# Altium PCB AICat V1.7 双面板 板厚1.6mm_lrd.PcbDoc (part 1 of 6)
Units mm, origin at the board's own origin, x right, y up, seen from the top; angles counter-clockwise.
Board outline 63.83 x 43.59 mm, 2 copper layers (Top Layer, Bottom Layer); 123 components, 84 nets, 332 pads, 255 vias.
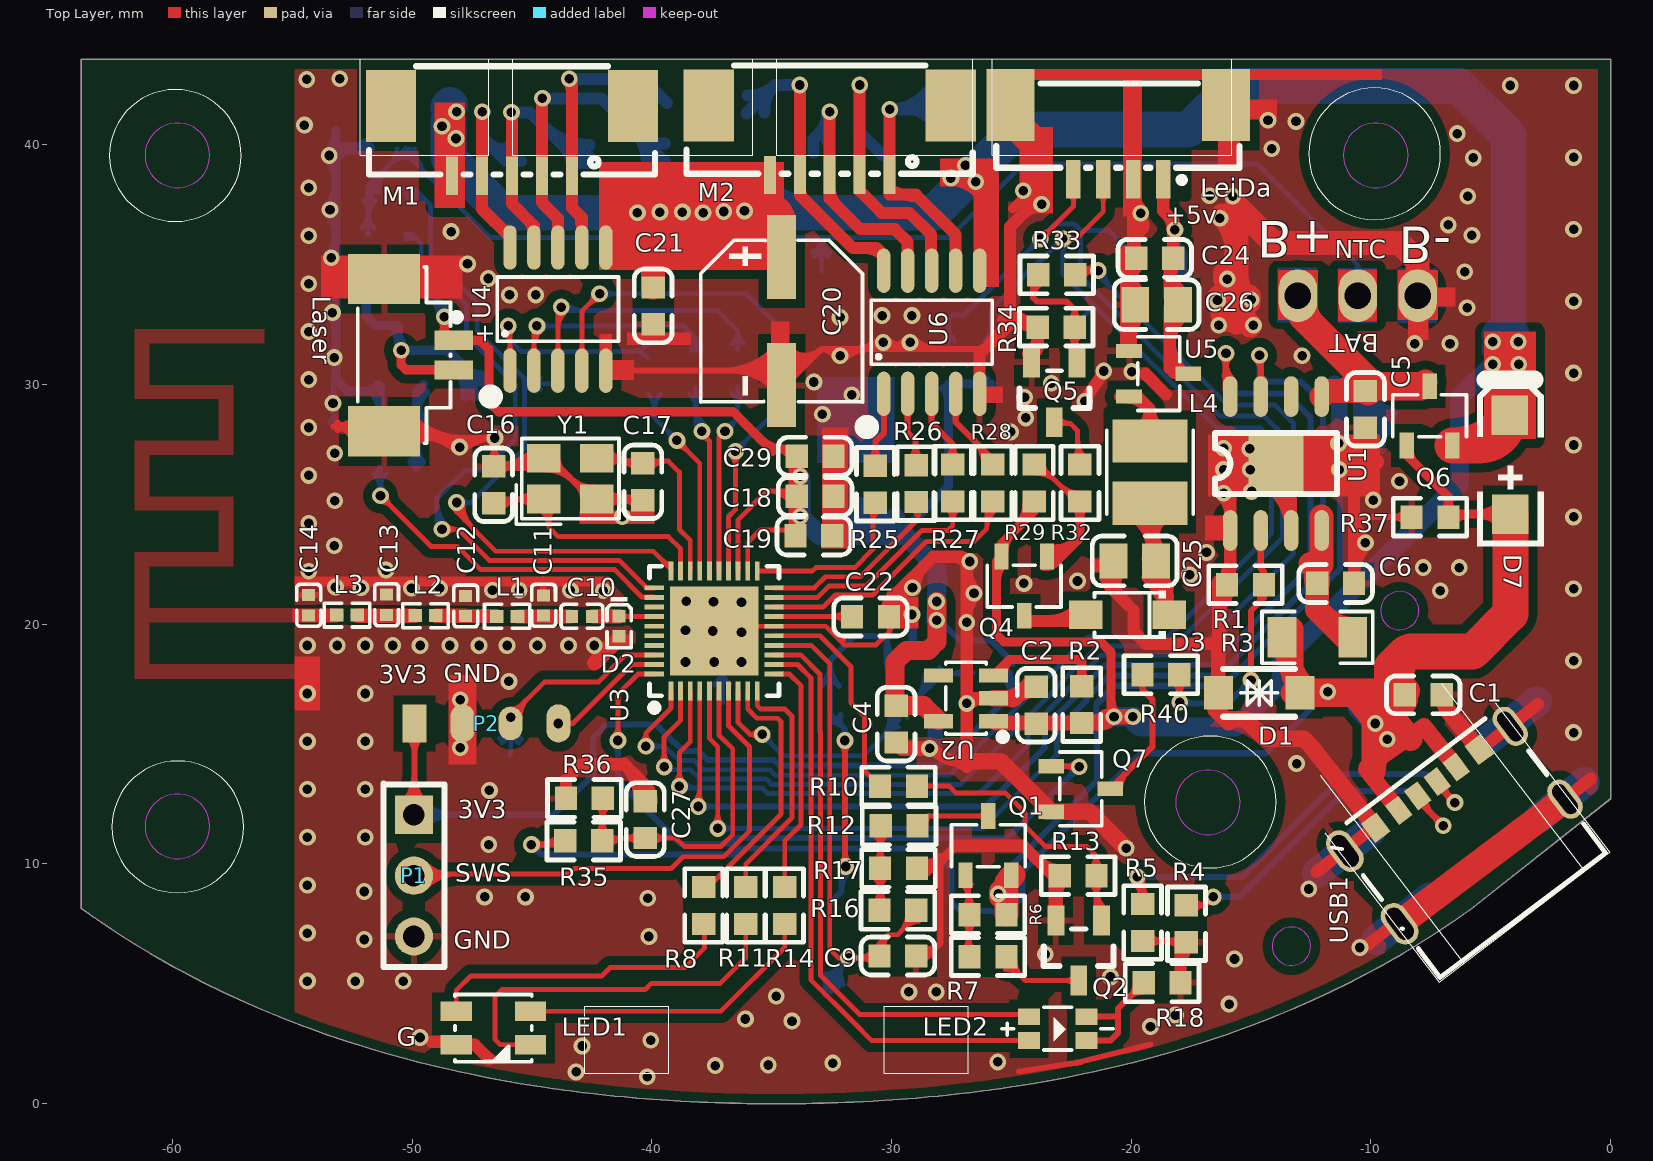
[diagram p0: Top Layer view]
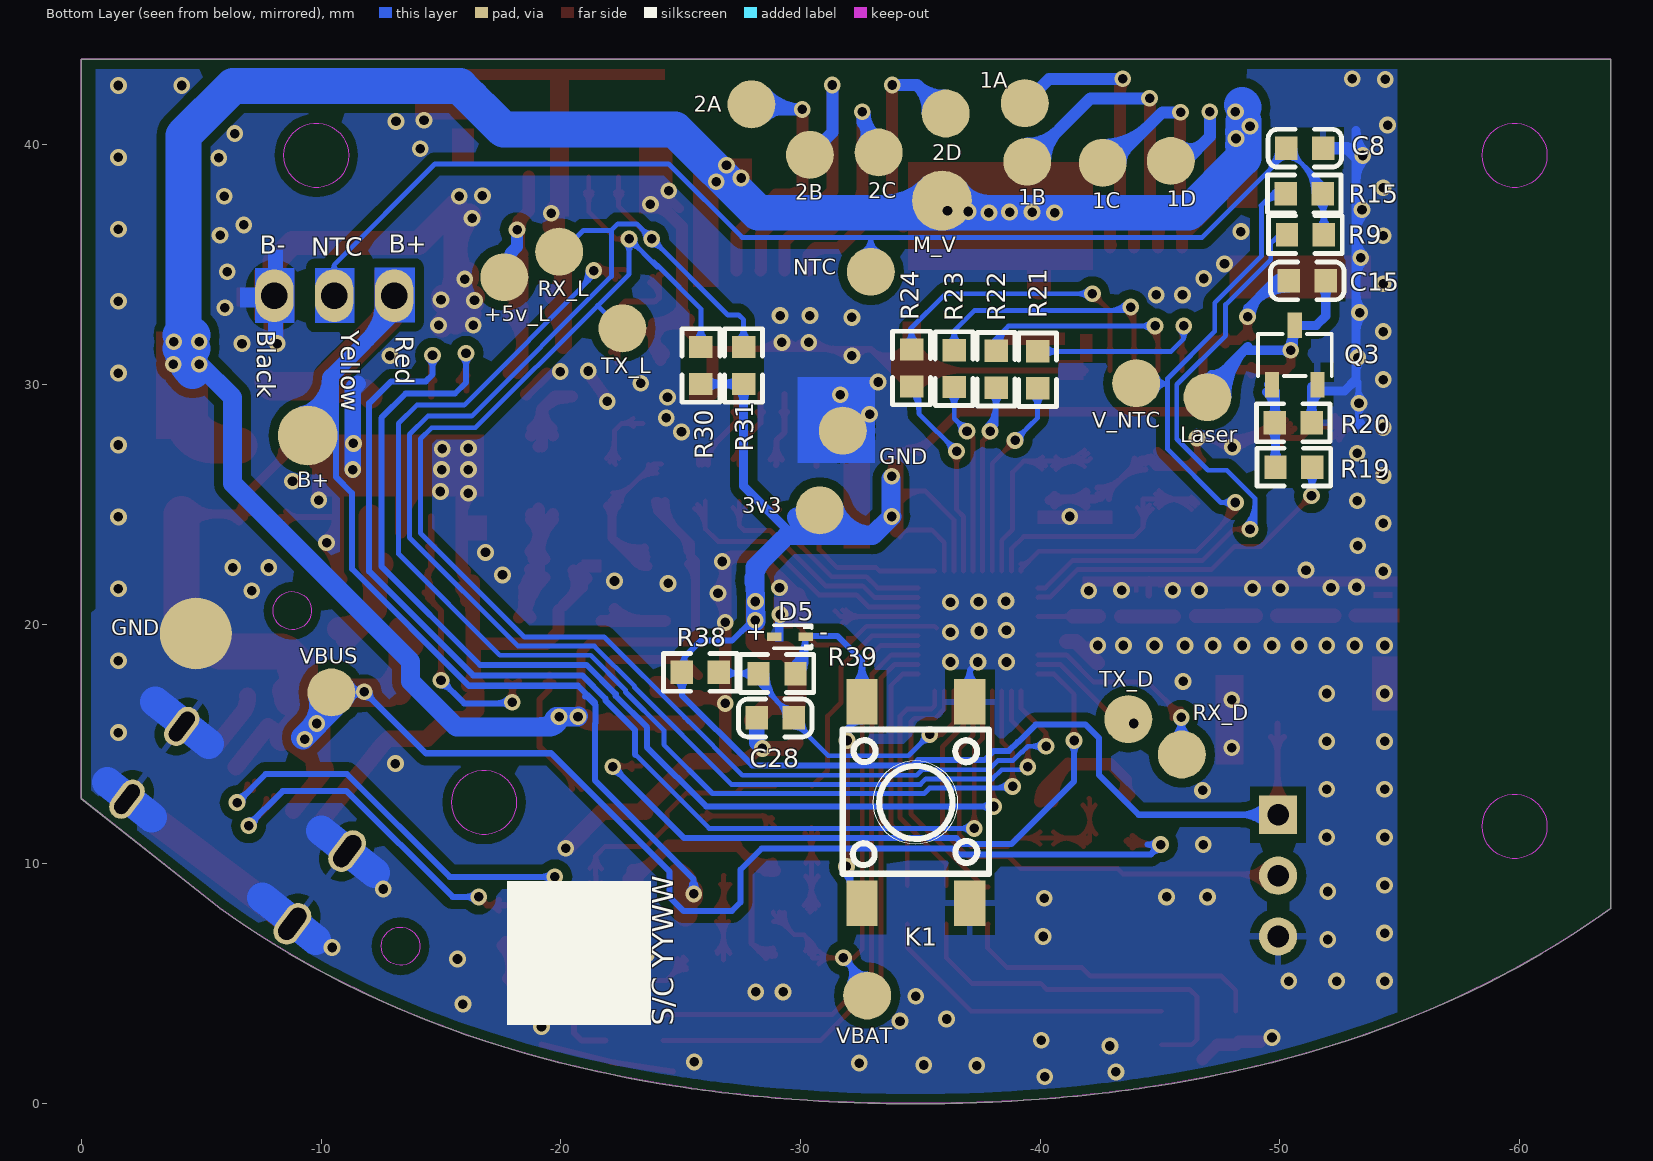
[diagram p1: Bottom Layer view, seen from below]
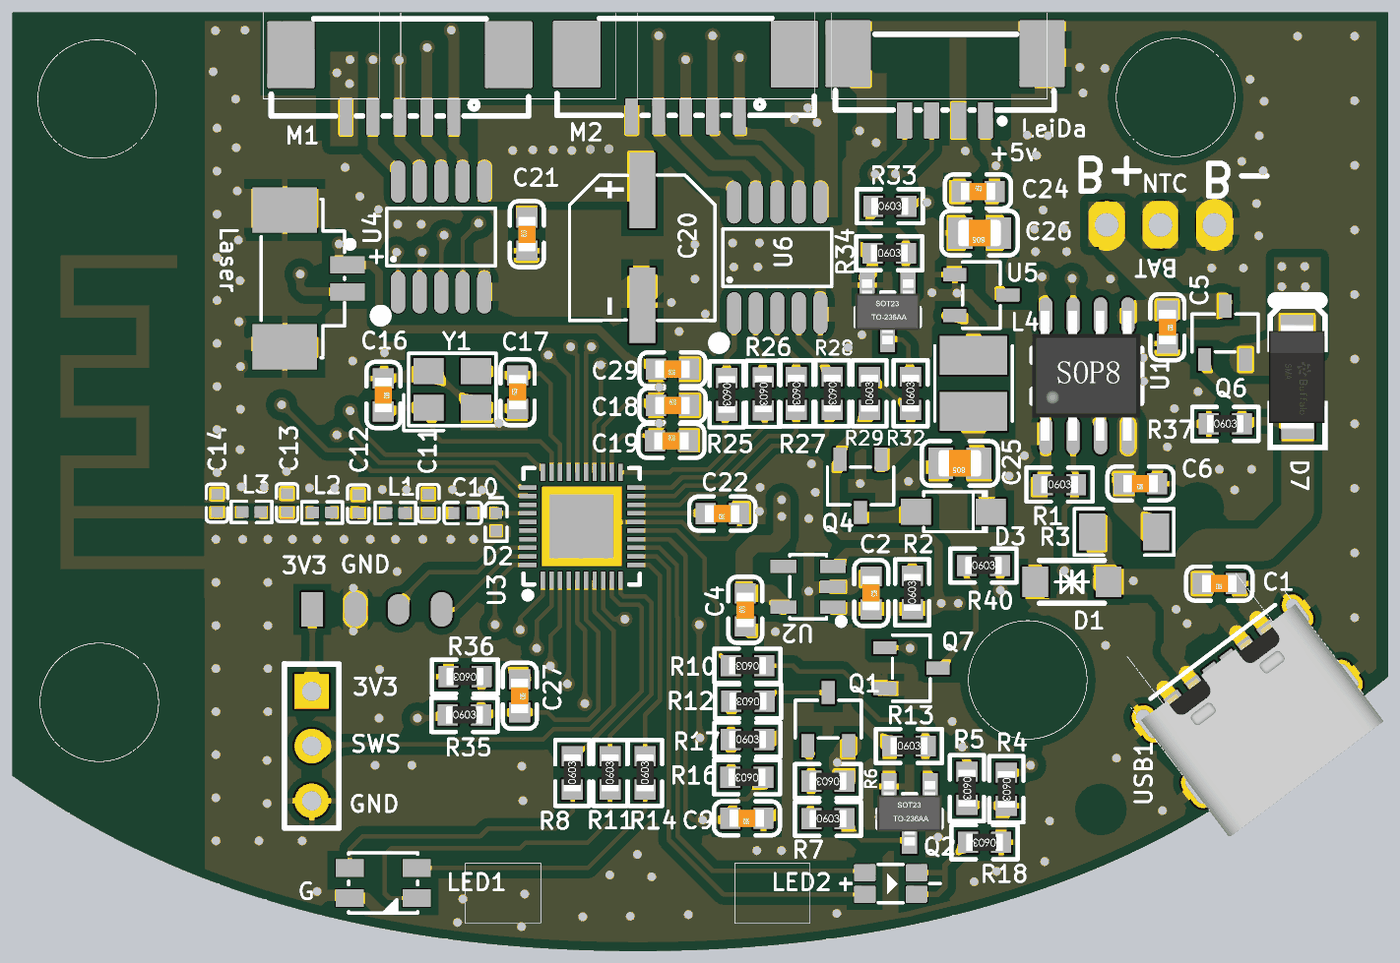
[diagram p7: 3D render of the assembled board from above, using the file's embedded part models]
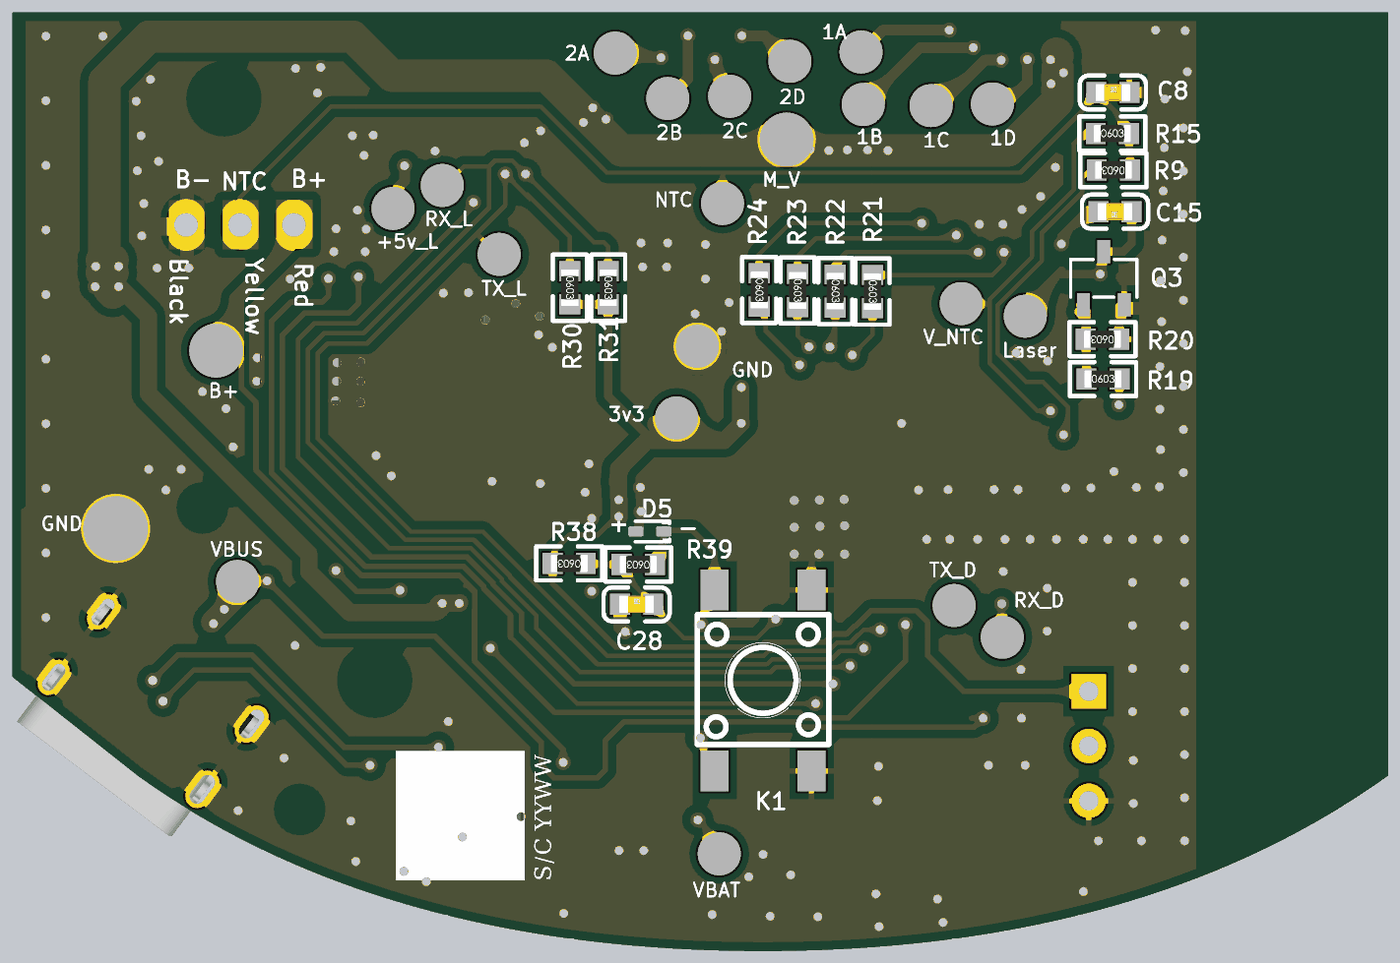
[diagram p8: 3D render of the assembled board from below, using the file's embedded part models]

## Layer stack, top to bottom
Top Solder: solder mask 0.0102, Solder Resist, Dk 3.5
Top Layer: signal copper 0.0356
Dielectric1: dielectric 0.32, FR-4, Dk 4.8
Bottom Layer: signal copper 0.0356
Bottom Solder: solder mask 0.0102, Solder Resist, Dk 3.5

## Board outline
-43.149,0.488 -42.885,0.456 -42.884,0.456 -42.587,0.421 -42.587,0.42 -42.257,0.383 -42.256,0.383 -41.927,0.347 -41.926,0.347 -41.564,0.31 -41.136,0.269 -40.644,0.226 -39.958,0.171 -39.309,0.127 -38.825,0.097 -38.407,0.075 -38.023,0.057 -38.022,0.057 -37.671,0.042 -37.353,0.03 -37.352,0.03 -37.067,0.021 -36.781,0.012 -36.528,0.006 -36.276,0.001 -36.024,-0.004 -36.023,-0.004 -35.803,-0.007 -35.583,-0.01 -35.363,-0.012 -35.175,-0.013 -34.987,-0.013 -34.8,-0.014 -34.612,-0.013 -34.424,-0.013 -34.236,-0.012 -34.016,-0.01 -33.796,-0.007 -33.576,-0.004 -33.324,0.001 -33.071,0.006 -32.818,0.012 -32.532,0.021 -32.247,0.03 -32.246,0.03 -31.928,0.042 -31.577,0.057 -31.192,0.075 -30.774,0.097 -30.29,0.127 -29.641,0.171 -28.955,0.226 -28.463,0.269 -28.035,0.31 -27.673,0.347 -27.672,0.347 -27.343,0.383 -27.342,0.383 -27.012,0.42 -27.012,0.421 -26.715,0.456 -26.714,0.456 -26.45,0.488 -26.186,0.522 -26.185,0.522 -25.921,0.557 -25.69,0.589 -25.458,0.621 -25.227,0.655 -24.996,0.689 -24.798,0.72 -24.107,0.831 -23.289,0.975 -23.288,0.975 -22.735,1.08 -22.281,1.17 -21.894,1.25 -21.54,1.326 -21.22,1.397 -20.933,1.463 -20.648,1.529 -20.395,1.59 -20.143,1.652 -19.924,1.707 -19.705,1.763 -19.178,1.902 -18.474,2.098 -18.473,2.098 -17.869,2.276 -17.332,2.441 -16.86,2.592 -16.423,2.737 -16.422,2.737 -16.019,2.875 -15.647,3.006 -15.308,3.129 -15.307,3.129 -14.999,3.244 -14.694,3.36 -14.363,3.488 -14.009,3.63 -13.605,3.795 -13.604,3.795 -13.152,3.987 -12.575,4.24 ccw(c-29.194,41.32) -10.846,5.065 -10.574,5.204 -10.573,5.204 -10.303,5.345 -9.986,5.513 -9.622,5.711 -9.215,5.939 -8.669,6.254 ccw(c-27.844,38.837) -6.797,7.43 ccw(c-27.664,38.569) -5.787,8.131 -5.787,8.132 0.008,12.717 0.013,12.741 0.013,43.562 0,43.575 -63.804,43.575 -63.817,43.562 -63.817,8.142 -63.812,8.131 ccw(c-41.932,38.573) -62.802,7.43 ccw(c-41.754,38.837) -60.93,6.254 -60.385,5.939 -59.977,5.711 -59.614,5.513 -59.296,5.345 -59.026,5.204 -59.025,5.204 -58.753,5.065 ccw(c-40.406,41.319) -57.024,4.24 -56.447,3.987 -55.995,3.795 -55.994,3.795 -55.59,3.63 -55.236,3.488 -54.906,3.36 -54.6,3.244 -54.292,3.129 -54.291,3.129 -53.952,3.006 -53.581,2.875 -53.177,2.737 -53.176,2.737 -52.739,2.592 -52.267,2.441 -51.73,2.276 -51.126,2.098 -51.125,2.098 -50.421,1.902 -49.894,1.763 -49.675,1.707 -49.456,1.652 -49.204,1.59 -48.951,1.53 -48.666,1.463 -48.379,1.397 -48.059,1.326 -47.706,1.25 -47.318,1.17 -46.864,1.08 -46.311,0.975 -46.31,0.975 -45.492,0.831 -44.801,0.72 -44.603,0.689 -44.372,0.655 -44.141,0.621 -43.91,0.589 -43.678,0.557 -43.414,0.522 -43.413,0.522

## Design rules (kind name [scope] priority, off if disabled: settings)
Clearance [All] p1: gap=0.14 ignorepadtopadclearanceinfootprint=FALSE
ComponentClearance [All] p1: gap=0 collisioncheckmode=3 verticalgap=0 showdistances=FALSE
FabricationTestPointUsage TestPointUsage [All] p1: valid=0 allowmultiple=FALSE
FabricationTestpoint Testpoint [All] p1: side=3 testpointundercomponent=TRUE minsize=1.016 maxsize=2.54 preferedsize=1.524 minholesize=0 maxholesize=1.016 preferedholesize=0.813 testpointgrid=0.025 allowsidetop=TRUE allowsidebottom=TRUE usegrid=TRUE gridtolerance=0
HoleToHoleClearance [All] p1: gap=0.102 allowstackedmicrovias=TRUE
MinimumSolderMaskSliver [All] p1: minsoldermaskwidth=0.051
PlaneConnect [All] p1: planeconnectstyle=Relief reliefexpansion=0.254 reliefentries=4 reliefconductorwidth=0.508 reliefairgap=0.254
PolygonConnect PolygonConnect_1 [IsVia] p1: connectstyle=Direct reliefconductorwidth=0.254 reliefentries=4 polygonreliefangle="90 Angle" airgapwidth=0.254
PolygonConnect [All] p2: connectstyle=Direct reliefconductorwidth=0.254 reliefentries=4 polygonreliefangle="90 Angle" airgapwidth=0.254
RoutingVias [All] p1: holewidth=0.711 width=1.27 viastyle="Through Hole" minholewidth=0.711 minwidth=1.27 maxholewidth=0.711 maxwidth=1.27
SilkToSilkClearance [All] p1: silktosilkclearance=0
SilkToSolderMaskClearance SilkscreenOverComponentPads [IsPad] p1: minsilkscreentomaskgap=0 clearancetoexposedcopper=TRUE
SolderMaskExpansion [All] p1: expansion=0.102 istentingtop=FALSE
Width [All] p1: maxlimit=2.54 minlimit=0.203 preferedwidth=0.254 minimp=50.000000 maximp=50.000000 favimp=50.000000
22 further rules are at their usual default settings.

## Classes and differential pairs
component class "ball V1.1": ANT1 BAT C1 C2 C4 C5 C6 C8 C9 C10 C11 C12 C13 C14 C15 C16 C17 C18 C19 C20 C21 C22 C24 C25 C26 C27 C28 C29 D1 D2 D3 D5 D7 K1 L1 L2 L3 L4 Laser LED1 LED2 LeiDa M1 M2 P1 P2 Q1 Q2 Q3 Q4 Q5 Q6 Q7 R1 R2 R3 R4 R5 R6 R7 R8 R9 R10 R11 R12 R13 R14 R15 R16 R17 R18 R19 R20 R21 R22 R23 R24 R25 R26 R27 R28 R29 R30 R31 R32 R33 R34 R35 R36 R37 R38 R39 R40 U1 U2 U3 U4 U5 U6 USB1 Y1

## Components (designator, comment, footprint, x,y, rotation, side; value= is the part's Value field where it differs from the comment)
1A "J-CSD" TP#1 -39.363,41.738 r270 bottom (schematic designator TP3)
1B "J-CSD" TP#1 -39.464,39.299 r270 bottom (schematic designator TP3)
1C "J-CSD" TP#1 -42.614,39.249 r270 bottom (schematic designator TP3)
1D "J-CSD" TP#1 -45.459,39.325 r270 bottom (schematic designator TP3)
2A "J-CSD" TP#1 -27.958,41.687 r270 bottom (schematic designator TP3)
2B "J-CSD" TP#1 -30.397,39.579 r270 bottom (schematic designator TP3)
2C "J-CSD" TP#1 -33.267,39.68 r270 bottom (schematic designator TP3)
2D "J-CSD" TP#1 -36.061,41.306 r270 bottom (schematic designator TP3)
3v3 "J-CSD" TP#1 -30.803,24.745 r270 bottom (schematic designator TP3)
+5v_L "J-CSD" TP#1 -17.646,34.473 r270 bottom (schematic designator TP3)
B+ "J-CSD" TP#2 -9.442,27.869 r270 bottom (schematic designator TP3)
BAT "BX-PH2.0-3PWT" HDR-TH_3P-P2.50_ZX-XH2.54-3PWZ -9.848,37.852 r180 top (schematic designator BAT1)
C1 "0.1uF" 0603_C -7.816,17.049 r180 top
C2 "1uf" 0603_C -23.97,16.617 r270 top
C4 "10uF" 0603_C -29.812,15.83 r90 top
C5 "10uf" 0603_C -10.229,28.962 r270 top
C6 "10UF" 0603_c -11.474,21.697 r180 top
C8 "100nF" 0603_C -51.047,39.858 r180 bottom
C9 "100nF" 0603_C -29.736,6.152 r180 top
C10 "220pF" C0402 -42.919,20.326 r180 top
C11 "NC" C0402 -44.519,20.783 r270 top
C12 "NC" C0402 -47.77,20.757 r270 top
C13 "NC" C0402 -51.072,20.808 r270 top
C14 "NC" C0402 -54.323,20.788 r270 top
C15 "0.1uf/25v" 0603_C -51.148,34.321 r0 bottom
C16 "12PF" 0603_c -46.602,25.812 r270 top
C17 "12PF" 0603_c -40.379,25.939 r90 top
C18 "1UF" 0603_c -33.191,25.329 r0 top
C19 "1UF" 0603_c -33.241,23.678 r0 top
C20 "220uF/10V" "SMD 6.3*5.4 电解" -34.613,32.492 r270 top
C21 "100nf" 0603_C -39.947,33.28 r90 top
C22 "1UF" 0603_c -30.879,20.3 r180 top
C24 "0.1uF" 0603_C -19.017,35.261 r0 top
C25 "22uf-16v" 0805_c -19.856,22.637 r180 top
C26 "22uf-16v" 0805_c -18.941,33.33 r180 top
C27 "0.1uF" 0603_C -40.277,11.842 r270 top
C28 "100nF" 0603_c -28.949,16.084 r180 bottom
C29 "10uF 10v" 0603_C -33.191,27.006 r180 top
D1 "SMF5.0CA_C726939" "SOD-123 双向" -14.496,17.074 r0 top
D2 "SE6V3LHN102T 6.3v单向" 0402-D -41.242,19.843 r270 top
D3 "DSK24" SOD-123FL -20.313,20.224 r180 top
D5 "esd5z5.0t1g-ms" SOD-523_L1.2-W0.8-LS1.6-RD -29.566,19.472 r0 bottom
D7 "SS54" SMA -4.108,26.041 r270 top
GND "J-CSD" TP#3 -4.776,19.609 r270 bottom (schematic designator TP3)
GND "J-CSD" TP#1 -31.768,28.073 r270 bottom (schematic designator TP3)
K1 "KEY" KEY_SMD_4P -34.816,12.604 r270 bottom locked
L1 "0R" R0402 -46.043,20.326 r180 top
L2 "0R" R0402 -49.447,20.351 r180 top
L3 "0R" R0402 -52.723,20.376 r180 top
L4 "47uH" IND-SMD_L3.5-W3.0_CD31 -19.221,26.345 r90 top
Laser "JiGuang" CONN-SMD_2P-P1.25-LT -49.726,31.222 r270 top (schematic designator CN1)
Laser "J-CSD" TP#1 -46.983,29.47 r270 bottom (schematic designator TP3)
LED1 "XL-A3528RGBC-BM" LED-ARRAY-SMD_4P-L3.2-W2.8-LS3.5-BL_XL-A3528RGBC-BM -46.615,3.147 r0 top
LED2 "*" LED-SMD_4P-L3.2-W1.6-TL_XL-3216SURUGC -23.068,3.122 r0 top
LeiDa "HC-1.25-4PLT" CONN-SMD_4P-P1.25_LT -20.541,40.112 r180 top (schematic designator CN2)
M1 "MOTORA" CONN-SMD_1.25-5PLT -45.84,40.163 r180 top (schematic designator J1)
M2 "MOTORB" CONN-SMD_1.25-5PLT -32.581,40.188 r180 top (schematic designator J2)
M_V "J-CSD" TP#2 -35.908,37.674 r270 bottom (schematic designator TP3)
NTC "J-CSD" TP#1 -32.937,34.702 r270 bottom (schematic designator TP3)
P1 "DEBUG" SIP4-2.54#1 -49.929,14.585 r270 top (schematic designator P2)
P2 "UART" SIP4-2.54#2 -49.904,15.855 r0 top
Q1 "SI2301 P" SOT-23 -25.748,10.242 r270 top
Q2 "S8050" SOT-23(SOT-23-3) -22.192,6.381 r90 top
Q3 "AO3400" SOT-23 -50.844,30.714 r270 bottom
Q4 "SI2301 P" SOT-23 -24.682,22.104 r90 top
Q5 "S8050" SOT-23(SOT-23-3) -23.208,29.673 r90 top
Q6 "3401" SOT-23 -7.333,28.174 r270 top
Q7 "2N7002" SOT-23 -22.624,12.909 r180 top
R1 "3.9K" 0603_R -15.233,21.646 r0 top
R2 "10k" 0603_R -22.065,16.643 r90 top
R3 "R250" 1206_R -12.388,19.411 r180 top
R4 "5.1K" 0603_R -17.697,7.499 r270 top
R5 "5.1K" 0603_R -19.525,7.549 r270 top
R6 "560K" 0603_R -25.977,7.88 r180 top
R7 "1K" 0603_R -25.977,6.127 r0 top
R8 "1k" 0603_R -37.839,8.261 r90 top
R9 "10k" 0603_R -51.072,36.251 r0 bottom
R10 "1K" 0603_r -29.711,13.239 r180 top
R11 "1k" 0603_R -36.086,8.261 r90 top
R12 "560K" 0603_R -29.685,11.588 r180 top
R13 "10K" 0603_r -22.218,9.505 r0 top
R14 "1k" 0603_R -34.461,8.261 r90 top
R15 "100R" 0603_R -51.021,37.953 r180 bottom
R16 "1K" 0603_R -29.736,8.057 r180 top
R17 "100K" 0603_R -29.711,9.81 r0 top
R18 "1K" 0603_R -18.713,5.035 r180 top
R19 "330R" 0603_R -50.59,26.549 r180 bottom
R20 "10K" 0603_R -50.564,28.403 r0 bottom
R21 "330R" 0603_R -39.896,30.613 r270 bottom
R22 "330R" 0603_R -38.169,30.638 r270 bottom
R23 "330R" 0603_R -36.416,30.663 r270 bottom
R24 "330R" 0603_R -34.638,30.689 r270 bottom
R25 "330R" 0603_R -30.676,25.837 r270 top
R26 "330R" 0603_R -28.974,25.863 r270 top
R27 "330R" 0603_R -27.45,25.888 r270 top
R28 "330R" 0603_R -25.774,25.888 r270 top
R29 "560K" 0603_R -24.047,25.888 r90 top
R30 "1M" 0603_R -25.85,30.79 r270 bottom
R31 "1M" 0603_R -27.628,30.79 r270 bottom
R32 "1K" 0603_R -22.142,25.888 r90 top
R33 "1K" 0603_r -23.107,34.575 r0 top
R34 "10K" 0603_r -23.132,32.391 r0 top
R35 "10K" 0603_R -42.843,10.953 r0 top
R36 "20K" 0603_R -42.817,12.731 r180 top
R37 "10K" 0603_R -7.537,24.466 r0 top
R38 "10k" 0603_R -25.825,17.989 r0 bottom
R39 "100R" 0603_r -29.025,17.938 r0 bottom
R40 "2k" 0603_R -18.763,17.887 r0 top
RX_D "J-CSD" TP#1 -45.916,14.56 r270 bottom (schematic designator TP3)
RX_L "J-CSD" TP#1 -19.932,35.54 r270 bottom (schematic designator TP3)
TX_D "J-CSD" TP#1 -43.681,16.033 r270 bottom (schematic designator TP3)
TX_L "J-CSD" TP#1 -22.573,32.34 r270 bottom (schematic designator TP3)
U1 "TP4056X" SOP8-9 -13.963,26.701 r0 top
U2 "SSP7615" SOT-23-5 -27.069,16.465 r180 top
U3 "TLSR8208C" QFN-40_L5.0-W5.0-P0.40-BL-EP3.7 -37.356,19.64 r0 top
U4 "ULN2802" ESSOP-10 -43.782,32.949 r0 top
U5 "HE9116A50NR" SOT-23 -19.373,30.232 r180 top
U6 "ULN2802" ESSOP-10 -28.187,31.984 r0 top
USB1 "TYPE-C 6P" TPYE-C-6 -6.495,11.613 r127 top
V_NTC "J-CSD" TP#1 -44.011,30.054 r270 bottom (schematic designator TP3)
VBAT "J-CSD" TP#1 -32.784,4.501 r270 bottom (schematic designator TP3)
VBUS "J-CSD" TP#1 -10.432,17.151 r270 bottom (schematic designator TP3)
Y1 "24MHz +-20PPM" CRYSTAL-SMD_4P-L3.2-W2.5 -43.122,26.015 r0 top

## Footprints (in the part's own frame and the unit in brackets; to place one, negate y for a bottom-side part, rotate by r counter-clockwise, add the part's x,y. Pads: shape width x height; smd on the part's side, far side on the other; paste and mask are expansions set on the pad)
0402-D [mm]
  rect 0.505x0.551 smd paste-100 mask+0.051: 1(-0.484,-0.131) 2(0.349,-0.131)
  silkscreen extent -1.27,-0.64 0.83,0.37
0603_C [mm]
  rect 0.93x0.98 smd: 1(-0.77,0) 2(0.77,0)
  silkscreen extent -1.54,-0.79 1.54,0.79, body extent -0.8,-0.4 0.8,0.4, height 0.3
0603_c [mm]
  rect 0.93x0.98 smd: 1(-0.77,0) 2(0.77,0)
  silkscreen extent -1.54,-0.79 1.54,0.79, body extent -0.8,-0.4 0.8,0.4, height 0.3
0603_R [mm]
  rect 0.93x0.98 smd: 1(-0.77,0) 2(0.77,0)
  silkscreen extent -1.53,-0.79 1.54,0.79, body extent -0.85,-0.4 0.85,0.4, height 0.56
0603_r [mm]
  rect 0.93x0.98 smd: 1(-0.77,0) 2(0.77,0)
  silkscreen extent -1.53,-0.79 1.54,0.79, body extent -0.85,-0.4 0.85,0.4, height 0.56
0805_c [mm]
  rect 1.16x1.47 smd: 1(-0.89,0) 2(0.89,0)
  silkscreen extent -1.77,-1.04 1.77,1.04, body extent -1,-0.62 1,0.63, height 0.77
1206_R [mm]
  rect 1.208x1.701 smd: 1(-1.631,-0.039) 2(1.326,-0.039)
  silkscreen extent -2.46,-1.12 2.16,1.04
C0402 [mm]
  rect 0.5x0.54 smd: 1(-0.42,0) 2(0.42,0)
  silkscreen extent -0.87,-0.5 0.87,0.5
CONN-SMD_1.25-5PLT [mm]
  rect 0.5x1.6 smd paste+0.051: 1(-2.5,1.45) 2(-1.25,1.45) 3(0,1.45) 4(1.25,1.45) 5(2.5,1.45)
  rect 2.1x3 smd paste+0.051: 6(-5.05,-1.45) 7(5.05,-1.45)
  silkscreen extent -5.97,-3.12 5.97,1.4
CONN-SMD_2P-P1.25-LT [mm]
  rect 0.8x1.6 smd paste+0 mask+0.05: 1(-0.625,1.45) 2(0.625,1.45)
  rect 2.1x3 smd paste+0 mask+0.05: 3(-3.175,-1.45) 4(3.175,-1.45)
  silkscreen extent -3.68,-2.55 3.68,1.73
CONN-SMD_4P-P1.25_LT [mm]
  rect 0.6x1.6 smd paste+0.051: 1(-1.875,1.55) 2(-0.625,1.55) 3(0.625,1.55) 4(1.875,1.55)
  rect 2x3 smd paste+0.051: 5(-4.5,-1.55) 6(4.5,-1.55)
  silkscreen extent -5.06,-2.45 5.09,1.7
CRYSTAL-SMD_4P-L3.2-W2.5 [mm]
  rect 1.4x1.2 smd: 1(-1.383,-0.797) 2(0.817,-0.797) 3(0.817,0.903) 4(-1.383,0.903)
  silkscreen extent -2.54,-1.85 1.75,1.73
ESSOP-10 [mm]
  oval 0.56x1.855 smd paste+0.051: 1(-2.141,-2.375) 2(-1.141,-2.375) 3(-0.141,-2.375) 4(0.859,-2.375) 5(1.859,-2.375) 6(1.859,2.765) 7(0.859,2.765) 8(-0.141,2.765) 9(-1.141,2.765) 10(-2.141,2.765)
  silkscreen extent -2.67,-1.14 2.39,1.53
HDR-TH_3P-P2.50_ZX-XH2.54-3PWZ [mm]
  oval 1.6x2.2 hole 1.1: 1(-1.801,4.145) 2(0.699,4.145) 3(3.199,4.145)
IND-SMD_L3.5-W3.0_CD31 [mm]
  rect 1.8x3.12 smd: 1(-1.303,0) 2(1.303,0)
  silkscreen extent -1.75,-1.8 1.75,1.8
KEY_SMD_4P [mm]
  rect 1.9x1.3 smd: 1(-4.155,2.252) 2(4.244,2.252) 3(-4.155,-2.247) 4(4.244,-2.247)
  silkscreen extent -3.01,-3.05 3.02,3.05
LED-ARRAY-SMD_4P-L3.2-W2.8-LS3.5-BL_XL-A3528RGBC-BM [mm]
  rect 1.3x0.82 smd paste+0 mask+0.05: 1(-1.55,-0.7) 2(-1.55,0.7) 3(1.55,-0.7) 4(1.55,0.7)
  silkscreen extent -1.6,-1.4 1.6,1.4
LED-SMD_4P-L3.2-W1.6-TL_XL-3216SURUGC [mm]
  rect 0.9x0.7 smd paste+0.051: 1(-1.2,0.5) 2(1.2,0.5) 3(-1.2,-0.5) 4(1.2,-0.5)
  silkscreen extent -2.33,-0.89 2.3,0.89
QFN-40_L5.0-W5.0-P0.40-BL-EP3.7 [mm]
  rect 0.2x0.8 smd paste-100 mask+0.05: 1(-1.847,-2.425) 2(-1.447,-2.425) 3(-1.047,-2.425) 4(-0.647,-2.425) 5(-0.247,-2.425) 6(0.153,-2.425) 7(0.553,-2.425) 8(0.953,-2.425) 9(1.353,-2.425) 10(1.753,-2.425) 21(1.753,2.573) 22(1.353,2.573) 23(0.953,2.573) 24(0.553,2.573) 25(0.153,2.573) 26(-0.247,2.573) 27(-0.647,2.573) 28(-1.047,2.573) 29(-1.447,2.573) 30(-1.847,2.573)
  rect 0.8x0.2 smd paste-100 mask+0.05: 11(2.452,-1.726) 12(2.452,-1.326) 13(2.452,-0.926) 14(2.452,-0.526) 15(2.452,-0.126) 16(2.452,0.274) 17(2.452,0.674) 18(2.452,1.074) 19(2.452,1.474) 20(2.452,1.874) 31(-2.546,1.874) 32(-2.546,1.474) 33(-2.546,1.074) 34(-2.546,0.674) 35(-2.546,0.274) 36(-2.546,-0.126) 37(-2.546,-0.526) 38(-2.546,-0.926) 39(-2.546,-1.326) 40(-2.546,-1.726)
  rect 3.7x3.7 smd paste-100 mask+0.05: 41(-0.047,0.074)
  silkscreen extent -2.75,-3.28 2.65,2.77
R0402 [mm]
  rect 0.566x0.54 smd paste-100 mask+0.051: 1(-0.433,0) 2(0.433,0)
  silkscreen extent -0.94,-0.5 0.94,0.5
SIP4-2.54#1 [mm]
  rect 1.6x1.6 hole 0.9: 2(2.54,0)
  round 1.6 hole 0.9: 3(5.08,0) 4(7.62,0)
  silkscreen extent 1.24,-1.27 8.89,1.27
SIP4-2.54#2 [mm]
  rect 1x1.6 smd: 1(0,0)
  oval 1x1.6 smd: 2(2,0) 4(6,0)
  oval 1x1.4 smd: 3(4,0)
SMA [mm]
  rect 1.65x1.53 smd: 1(1.449,-0.076) 2(-2.665,-0.102)
  silkscreen extent -4.16,-1.47 2.8,1.32, body extent -3.06,-1.39 1.84,1.18, height 2.39
"SMD 6.3*5.4 电解" [mm]
  rect 3.5x1.2 smd: 1(-2.822,0.023) 2(2.518,0.023)
  silkscreen extent -3.53,-3.35 3.22,3.4
"SOD-123 双向" [mm]
  rect 1.2x1.4 smd: 1(-1.864,0.06) 2(1.536,0.06)
  silkscreen extent -1.66,-0.94 1.34,1.06
SOD-123FL [mm]
  rect 1.4x1.2 smd: 1(1.579,-0.166) 2(-1.891,-0.166)
  silkscreen extent -1.76,-1.17 1.22,0.84
SOD-523_L1.2-W0.8-LS1.6-RD [mm]
  rect 0.6x0.36 smd paste+0.051 mask+0: 1(-0.65,0) 2(0.65,0)
  silkscreen extent -0.91,-0.55 0.68,0.55
SOP8-9 [mil]
  oval 24x66.93 smd: 1(-75,-110) 2(-25,-110) 3(25,-110) 4(75,-110) 5(75,110) 6(25,110) 7(-25,110) 8(-75,110)
  rect 90.55x90.55 smd: 9(0,0)
  silkscreen extent -100,-50 100,50, body extent -100,-119 98,119, height 63
SOT-23 [mm]
  rect 1.07x0.6 smd: 1(0.719,-1.166) 2(0.719,0.734) 3(-1.751,-0.216)
  silkscreen extent -1.39,-1.75 0.36,1.32
SOT-23(SOT-23-3) [mm]
  rect 1.25x0.7 smd: 1(1.25,-0.95) 2(1.25,0.95) 3(-1.25,0)
  silkscreen extent -0.65,-1.46 0.9,1.46, body extent -1.5,-1.5 1.5,1.5, height 1.3
SOT-23-5 [mm]
  rect 1.2x0.6 smd paste+0 mask+0.05: 1(-1.325,0.51) 2(-1.325,-0.44) 3(-1.325,-1.39) 4(0.975,-1.39) 5(0.975,0.51)
  silkscreen extent -1.85,-1.94 0.67,1.32
TP#1 [mm]
  round 2 smd: 1(0,0)
TP#2 [mm]
  round 2.5 smd: 1(0,0)
TP#3 [mm]
  round 3 smd: 1(0,0)
TPYE-C-6 [mm]
  oval 1.9x1.1 hole 0.7 slot 1.5 at 0 deg: 7(-1.9,4.32) 7(1.9,4.32)
  oval 1.8x1 hole 0.6 slot 1.4 at 0 deg: 7(-1.9,-4.32) 7(1.9,-4.32)
  rect 1x0.7 smd: A5(1.9,0.5) A9(1.9,-1.5) B5(1.9,-0.5) B9(1.9,1.5)
  rect 1x0.8 smd: A12(1.9,-2.7) B12(1.9,2.7)
  silkscreen extent -4.7,-4.32 2.79,4.65, body extent -4.55,-4.45 2.25,4.49, height 3.41

## Part data
C1 C4 C5 C15 C24 C27 C29: library part Cap, "Capacitor"
C2 C21 C25 C26: library part Cap1, "无极电容"
C6 C8 C9 C18 C19 C22: library part CAP
C10 C11 C12 C13 C14 C16 C17: library part CAP, "Capacitor"
C20: library part RVT1A221M0605_C72494
C28: library part CAP_0603
D2: library part TPNSR05F20NXT5G
D3 D7: library part "Diode 1N4148", "High Conductance Fast Diode"
D5: library part LESD5Z5.0CT1G
K1: library part TS-1002S-05026C
L1 L2 L3: library part INDUCTOR
L4: library part "CD31-470M 47UH"
Laser: library part HC-1.25-2PLT
LED2: library part TJ-S2012SW8TCGLC2R2G-A5
M1 M2: library part HC-1.25-5PLT
P1 P2: library part "Header 4", "Header, 4-Pin"
Q1 Q3 Q4: library part JMTL3400A
Q2 Q5: library part NPN_sot23, "NPN三极管"
Q6: library part CJ3401
Q7: library part AO3400_SOT23
R1 R3 R4 R5 R6 R7 R8 R11 R12 R14 R16 R17 R18 R20 R29 R30 R31 R32 R35 R36 R38 R40: library part RES
R2 R9 R10 R13 R15 R19 R21 R22 R23 R24 R25 R26 R27 R28 R33 R34 R37: library part Res2, "Resistor"
R39: library part Res_0603
U1: library part TP4056, "TP4056"
U2: library part SSP7615-33M5R
U4 U6: library part ULN2802_C2828555
USB1: library part "TYPE-C 6P LTH6.5"
Y1: library part TAXM13.56M4RLBCCT2T

## Via types
v1: diameter 0.7, hole 0.4, Top Layer to Bottom Layer, tented both sides, 255 vias

## Nets (pads, with @x,y where several pads share a name; then routed paths per layer and width w, separated by ;. In a path a pad name is that pad's centre, name@x,y a point inside that pad or via, vN(x,y) a via of type N, cw(c..) or ccw(c..) an arc to the next point about the centre after c; other vN are vias at no path point)
3V3: 3v3.1 C4.2 C15.2 C18.1 C19.1 C29.2 Laser.1@-48.276,31.847 P1.2 P2.1 R30.2 R31.2 R38.2 U2.5 U3.22 U3.23 | length 239.9
  Top Layer w0.203: U3.23@-36.403,22.213 -36.403,24.352 -35.197,25.558 ; U3.22@-36.003,22.213 -36.003,23.221 -36.003,23.406 -35.477,23.932 -34.596,23.932 ; -34.607,23.932 cw(c-34.607,23.442) C19.1@-34.158,23.639 ; C18.1@-34.037,25.558 -34.435,25.558 ; -35.197,25.558 cw(c-35.197,24.29) -34.236,25.117 ccw(c-35.197,24.29) -35.197,25.558 ; -35.197,25.558 -34.435,25.558 ; -34.638,25.558 cw(c-34.638,25.233) C18.1@-34.318,25.29 ; -34.638,25.558 cw(c-34.638,25.233) C18.1@-34.318,25.29 ; -34.638,25.558 cw(c-34.638,25.233) C18.1@-34.318,25.29 ; -34.638,25.558 -34.435,25.558 ; C18.1@-34.396,25.558 cw(c-34.396,25.276) C18.1@-34.118,25.326 ; C18.1@-34.396,25.558 cw(c-34.396,25.276) C18.1@-34.118,25.326 ; C18.1@-34.396,25.558 cw(c-34.396,25.276) C18.1@-34.118,25.326 ; -34.754,25.558 cw(c-34.754,24.671) -34.082,25.25 ccw(c-34.754,24.671) -34.754,25.558
  Top Layer w0.254: P1.2@-49.929,12.045 -49.904,12.071 P2.1@-49.904,15.855 ; P1.2@-50.405,12.521 ccw(c-51.615,13.731) -49.904,13.731 ; P1.2@-50.405,12.521 ccw(c-51.615,13.731) -49.904,13.731 ; P1.2@-50.405,12.521 ccw(c-51.615,13.731) -49.904,13.731 ; P1.2@-50.405,12.521 ccw(c-51.615,13.731) -49.904,13.731 ; P1.2@-50.405,12.521 ccw(c-51.615,13.731) -49.904,13.731 ; P1.2@-50.225,12.341 ccw(c-51.002,13.118) -49.904,13.118 ; P1.2@-50.225,12.341 ccw(c-51.002,13.118) -49.904,13.118 ; P1.2@-50.225,12.341 ccw(c-51.002,13.118) -49.904,13.118 ; P1.2@-50.225,12.341 ccw(c-51.002,13.118) -49.904,13.118 ; P1.2@-50.225,12.341 ccw(c-51.002,13.118) -49.904,13.118 ; P2.1@-50.168,15.291 cw(c-50.804,14.655) -49.904,14.655 ; P2.1@-50.168,15.291 cw(c-50.804,14.655) -49.904,14.655 ; P2.1@-50.168,15.291 cw(c-50.804,14.655) -49.904,14.655 ; P2.1@-50.168,15.291 cw(c-50.804,14.655) -49.904,14.655 ; P2.1@-50.168,15.291 cw(c-50.804,14.655) -49.904,14.655 ; -49.904,12.995 ccw(c-48.979,12.995) P1.2@-49.633,12.341 ; -49.904,12.995 ccw(c-48.979,12.995) P1.2@-49.633,12.341 ; -49.904,12.995 ccw(c-48.979,12.995) P1.2@-49.633,12.341 ; -49.904,12.995 ccw(c-48.979,12.995) P1.2@-49.633,12.341 ; -49.904,12.995 ccw(c-48.979,12.995) P1.2@-49.633,12.341 ; -49.904,13.609 ccw(c-48.366,13.609) P1.2@-49.453,12.521 ; -49.904,13.609 ccw(c-48.366,13.609) P1.2@-49.453,12.521 ; -49.904,13.609 ccw(c-48.366,13.609) P1.2@-49.453,12.521 ; -49.904,13.609 ccw(c-48.366,13.609) P1.2@-49.453,12.521 ; -49.904,13.609 ccw(c-48.366,13.609) P1.2@-49.453,12.521 ; -49.904,14.655 cw(c-49.003,14.655) P2.1@-49.64,15.291 ; -49.904,14.655 cw(c-49.003,14.655) P2.1@-49.64,15.291 ; -49.904,14.655 cw(c-49.003,14.655) P2.1@-49.64,15.291 ; -49.904,14.655 cw(c-49.003,14.655) P2.1@-49.64,15.291 ; -49.904,14.655 cw(c-49.003,14.655) P2.1@-49.64,15.291
  Top Layer w0.381: v1(-48.659,32.822) -48.659,32.23 Laser.1@-48.276,31.847 -47.176,31.847 -46.805,31.476 -46.805,29.266 -46.399,28.86 -36.614,28.86 -35.956,28.203 ; -35.553,27.799 -35.956,28.203 ; -35.44,27.687 ccw(c-34.519,28.608) -34.519,27.305 ; -34.963,27.209 -35.956,28.203 ; C29.2@-34.404,27.209 C29.2@-34.011,27.209 ; C19.1@-34.037,23.932 C19.1@-34.011,23.958 ; Laser.1@-48.824,31.995 ccw(c-49.222,32.394) -48.659,32.394 ; Laser.1@-48.824,31.995 ccw(c-49.222,32.394) -48.659,32.394 ; Laser.1@-48.824,31.995 ccw(c-49.222,32.394) -48.659,32.394 ; Laser.1@-48.824,31.995 ccw(c-49.222,32.394) -48.659,32.394 ; Laser.1@-48.824,31.995 ccw(c-49.222,32.394) -48.659,32.394 ; v1@-48.772,32.71 cw(c-49.044,32.437) -48.659,32.437 ; v1@-48.772,32.71 cw(c-49.044,32.437) -48.659,32.437 ; v1@-48.772,32.71 cw(c-49.044,32.437) -48.659,32.437 ; v1@-48.772,32.71 cw(c-49.044,32.437) -48.659,32.437 ; v1@-48.772,32.71 cw(c-49.044,32.437) -48.659,32.437 ; -48.659,32.312 ccw(c-48.211,32.312) Laser.1@-48.528,31.995 ; -48.659,32.312 ccw(c-48.211,32.312) Laser.1@-48.528,31.995 ; -48.659,32.312 ccw(c-48.211,32.312) Laser.1@-48.528,31.995 ; -48.659,32.312 ccw(c-48.211,32.312) Laser.1@-48.528,31.995 ; -48.659,32.312 ccw(c-48.211,32.312) Laser.1@-48.528,31.995 ; -48.659,32.437 cw(c-48.274,32.437) v1@-48.546,32.71 ; -48.659,32.437 cw(c-48.274,32.437) v1@-48.546,32.71 ; -48.659,32.437 cw(c-48.274,32.437) v1@-48.546,32.71 ; -48.659,32.437 cw(c-48.274,32.437) v1@-48.546,32.71 ; -48.659,32.437 cw(c-48.274,32.437) v1@-48.546,32.71 ; Laser.1@-47.728,31.699 cw(c-47.37,31.341) -47.37,31.847 ; Laser.1@-47.728,31.699 cw(c-47.37,31.341) -47.37,31.847 ; Laser.1@-47.728,31.699 cw(c-47.37,31.341) -47.37,31.847 ; Laser.1@-47.728,31.699 cw(c-47.37,31.341) -47.37,31.847 ; Laser.1@-47.728,31.699 cw(c-47.37,31.341) -47.37,31.847 ; Laser.1@-47.728,31.995 ccw(c-47.37,32.353) -47.37,31.847 ; Laser.1@-47.728,31.995 ccw(c-47.37,32.353) -47.37,31.847 ; Laser.1@-47.728,31.995 ccw(c-47.37,32.353) -47.37,31.847 ; Laser.1@-47.728,31.995 ccw(c-47.37,32.353) -47.37,31.847 ; Laser.1@-47.728,31.995 ccw(c-47.37,32.353) -47.37,31.847
  Top Layer w0.6: C19.1@-34.011,23.958 C29.2@-34.011,27.006 ; -34.011,24.784 cw(c-33.44,24.784) C18.1@-33.844,25.188 ; -34.011,24.784 cw(c-33.44,24.784) C18.1@-33.844,25.188 ; -34.011,24.784 cw(c-33.44,24.784) C18.1@-33.844,25.188 ; -34.011,25.875 ccw(c-33.44,25.875) C18.1@-33.844,25.471 ; -34.011,25.875 ccw(c-33.44,25.875) C18.1@-33.844,25.471 ; -34.011,25.875 ccw(c-33.44,25.875) C18.1@-33.844,25.471 ; -34.011,26.46 cw(c-33.44,26.46) C29.2@-33.844,26.864 ; -34.011,26.46 cw(c-33.44,26.46) C29.2@-33.844,26.864 ; -34.011,26.46 cw(c-33.44,26.46) C29.2@-33.844,26.864 ; C19.1@-34.011,23.92 cw(c-33.292,23.92) -33.775,24.454 ccw(c-33.292,23.92) C19.1@-34.011,23.92 ; C18.1@-34.011,25.102 ccw(c-33.197,25.102) -33.773,24.527 cw(c-33.197,25.102) C18.1@-34.011,25.102 ; C18.1@-34.011,25.556 cw(c-33.197,25.556) -33.773,26.132 ccw(c-33.197,25.556) C18.1@-34.011,25.556 ; C29.2@-34.011,26.779 ccw(c-33.197,26.779) -33.773,26.203 cw(c-33.197,26.779) C29.2@-34.011,26.779
  Top Layer w0.8: C4.2@-29.863,16.82 -29.863,18.421 -29.381,18.903 ; C4.2@-29.812,16.6 -28.652,16.6 U2.5@-28.044,15.992 ; -29,18.903 -29.381,18.903 ; v1@-28.119,20.935 v1(-28.119,20.165) -28.111,20.157 -28.111,19.259 -28.466,18.903 -29.381,18.903
  Bottom Layer w0.254: P1.2@-49.929,12.045 -44.113,12.045 -42.462,13.696 -42.462,15.246 -41.903,15.804 -39.82,15.804 -39.094,15.078 -39.061,15.078 -38.695,14.712 -38.067,14.712 -37.686,14.331 -34.908,14.331 -34.68,14.103 -27.984,14.103 -25.055,17.032 R38.2@-25.055,17.989 ; v1@-28.268,20.777 cw(c-28.649,20.397) -28.111,20.397 cw(c-27.572,20.397) v1@-27.953,20.777 ; v1@-28.111,20.275 -27.145,19.31 -26.561,19.31 ; -26.256,19.31 -26.561,19.31 ; -25.799,19.259 -25.65,19.109 ; R38.2@-25.294,17.725 cw(c-25.871,17.148) -25.055,17.148 cw(c-24.239,17.148) R38.2@-24.816,17.725 ; P1.2@-49.633,11.749 cw(c-48.918,11.034) -48.918,12.045 ; P1.2@-49.633,11.749 cw(c-48.918,11.034) -48.918,12.045 ; P1.2@-49.633,11.749 cw(c-48.918,11.034) -48.918,12.045 ; P1.2@-49.633,11.749 cw(c-48.918,11.034) -48.918,12.045 ; P1.2@-49.633,11.749 cw(c-48.918,11.034) -48.918,12.045 ; P1.2@-49.633,12.341 ccw(c-48.918,13.057) -48.918,12.045 ; P1.2@-49.633,12.341 ccw(c-48.918,13.057) -48.918,12.045 ; P1.2@-49.633,12.341 ccw(c-48.918,13.057) -48.918,12.045 ; P1.2@-49.633,12.341 ccw(c-48.918,13.057) -48.918,12.045 ; P1.2@-49.633,12.341 ccw(c-48.918,13.057) -48.918,12.045 ; P1.2@-49.453,11.569 cw(c-48.304,10.42) -48.304,12.045 ; P1.2@-49.453,11.569 cw(c-48.304,10.42) -48.304,12.045 ; P1.2@-49.453,11.569 cw(c-48.304,10.42) -48.304,12.045 ; P1.2@-49.453,11.569 cw(c-48.304,10.42) -48.304,12.045 ; P1.2@-49.453,11.569 cw(c-48.304,10.42) -48.304,12.045 ; P1.2@-49.453,12.521 ccw(c-48.304,13.67) -48.304,12.045 ; P1.2@-49.453,12.521 ccw(c-48.304,13.67) -48.304,12.045 ; P1.2@-49.453,12.521 ccw(c-48.304,13.67) -48.304,12.045 ; P1.2@-49.453,12.521 ccw(c-48.304,13.67) -48.304,12.045 ; P1.2@-49.453,12.521 ccw(c-48.304,13.67) -48.304,12.045 ; -26.561,19.31 -25.85,19.31 -25.65,19.109 ; -25.65,19.109 -25.156,18.616 ; -25.156,18.616 ccw(c-24.862,18.616) -24.952,18.336 cw(c-24.862,18.616) -25.156,18.616 ; v1@-28.119,19.942 cw(c-28.119,19.12) -27.537,19.701 ccw(c-28.119,19.12) v1@-28.119,19.942 ; R38.2@-25.294,18.253 ccw(c-25.625,18.584) -25.156,18.584 cw(c-25.625,18.584) R38.2@-25.294,18.253
  Bottom Layer w0.381: C15.2@-50.378,34.321 -49.802,34.321 ; v1(-48.659,32.822) -48.659,33.178 ; -29.228,23.501 -29.423,23.695 -29.558,23.831 -27.628,25.761 R31.2@-27.628,30.02 R30.2@-25.85,30.02 ; C15.2@-50.441,34.382 cw(c-50.156,33.993) -49.815,34.334 ; C15.2@-50.441,34.382 cw(c-50.156,33.993) -49.815,34.334 ; C15.2@-50.441,34.382 cw(c-50.156,33.993) -49.815,34.334 ; C15.2@-50.441,34.382 cw(c-50.156,33.993) -49.815,34.334 ; C15.2@-50.441,34.382 cw(c-50.156,33.993) -49.815,34.334 ; C15.2@-50.378,34.021 cw(c-50.378,31.907) -48.883,33.402 ; C15.2@-50.378,34.021 cw(c-50.378,31.907) -48.883,33.402 ; C15.2@-50.378,34.021 cw(c-50.378,31.907) -48.883,33.402 ; C15.2@-50.378,34.021 cw(c-50.378,31.907) -48.883,33.402 ; C15.2@-50.378,34.021 cw(c-50.378,31.907) -48.883,33.402 ; C15.2@-50.378,34.402 cw(c-50.378,33.208) -49.534,34.053 ; C15.2@-50.378,34.402 cw(c-50.378,33.208) -49.534,34.053 ; C15.2@-50.378,34.402 cw(c-50.378,33.208) -49.534,34.053 ; C15.2@-50.378,34.402 cw(c-50.378,33.208) -49.534,34.053 ; C15.2@-50.378,34.402 cw(c-50.378,33.208) -49.534,34.053 ; C15.2@-50.216,34.075 cw(c-49.89,33.632) -49.502,34.02 ; C15.2@-50.216,34.075 cw(c-49.89,33.632) -49.502,34.02 ; C15.2@-50.216,34.075 cw(c-49.89,33.632) -49.502,34.02 ; C15.2@-50.216,34.075 cw(c-49.89,33.632) -49.502,34.02 ; C15.2@-50.216,34.075 cw(c-49.89,33.632) -49.502,34.02 ; C15.2@-50.165,34.148 cw(c-49.802,33.853) -49.802,34.321 ; C15.2@-50.165,34.148 cw(c-49.802,33.853) -49.802,34.321 ; C15.2@-50.165,34.148 cw(c-49.802,33.853) -49.802,34.321 ; C15.2@-50.165,34.148 cw(c-49.802,33.853) -49.802,34.321 ; C15.2@-50.165,34.148 cw(c-49.802,33.853) -49.802,34.321 ; C15.2@-50.165,34.494 ccw(c-49.802,34.788) -49.802,34.321 ; C15.2@-50.165,34.494 ccw(c-49.802,34.788) -49.802,34.321 ; C15.2@-50.165,34.494 ccw(c-49.802,34.788) -49.802,34.321 ; C15.2@-50.165,34.494 ccw(c-49.802,34.788) -49.802,34.321 ; C15.2@-50.165,34.494 ccw(c-49.802,34.788) -49.802,34.321 ; -49.802,34.321 -48.659,33.178 ; -49.183,33.702 cw(c-50.062,32.822) v1@-48.819,32.822 ; -49.183,33.702 cw(c-50.062,32.822) v1@-48.819,32.822 ; -49.183,33.702 cw(c-50.062,32.822) v1@-48.819,32.822 ; -49.183,33.702 cw(c-50.062,32.822) v1@-48.819,32.822 ; -49.183,33.702 cw(c-50.062,32.822) v1@-48.819,32.822 ; v1@-48.765,32.941 ccw(c-48.976,33.178) -48.659,33.178 ; v1@-48.765,32.941 ccw(c-48.976,33.178) -48.659,33.178 ; v1@-48.765,32.941 ccw(c-48.976,33.178) -48.659,33.178 ; v1@-48.765,32.941 ccw(c-48.976,33.178) -48.659,33.178 ; -48.659,33.178 ccw(c-48.343,33.178) v1@-48.553,32.941 ; -48.659,33.178 ccw(c-48.343,33.178) v1@-48.553,32.941 ; -48.659,33.178 ccw(c-48.343,33.178) v1@-48.553,32.941 ; -48.659,33.178 ccw(c-48.343,33.178) v1@-48.553,32.941 ; R31.2@-27.822,29.826 cw(c-28.291,29.358) -27.628,29.358 ; R31.2@-27.822,29.826 cw(c-28.291,29.358) -27.628,29.358 ; R31.2@-27.822,29.826 cw(c-28.291,29.358) -27.628,29.358 ; R31.2@-27.822,29.826 cw(c-28.291,29.358) -27.628,29.358 ; R31.2@-27.822,29.826 cw(c-28.291,29.358) -27.628,29.358 ; -27.628,29.358 cw(c-26.965,29.358) R31.2@-27.434,29.826 ; -27.628,29.358 cw(c-26.965,29.358) R31.2@-27.434,29.826 ; -27.628,29.358 cw(c-26.965,29.358) R31.2@-27.434,29.826 ; -27.628,29.358 cw(c-26.965,29.358) R31.2@-27.434,29.826 ; -27.628,29.358 cw(c-26.965,29.358) R31.2@-27.434,29.826 ; R31.2@-27.409,29.826 cw(c-26.94,29.358) -26.94,30.02 ; R31.2@-27.409,29.826 cw(c-26.94,29.358) -26.94,30.02 ; R31.2@-27.409,29.826 cw(c-26.94,29.358) -26.94,30.02 ; R31.2@-27.409,29.826 cw(c-26.94,29.358) -26.94,30.02 ; R31.2@-27.409,29.826 cw(c-26.94,29.358) -26.94,30.02 ; R31.2@-27.409,30.214 ccw(c-26.94,30.683) -26.94,30.02 ; R31.2@-27.409,30.214 ccw(c-26.94,30.683) -26.94,30.02 ; R31.2@-27.409,30.214 ccw(c-26.94,30.683) -26.94,30.02 ; R31.2@-27.409,30.214 ccw(c-26.94,30.683) -26.94,30.02 ; R31.2@-27.409,30.214 ccw(c-26.94,30.683) -26.94,30.02 ; -26.538,30.02 cw(c-26.538,29.358) R30.2@-26.069,29.826 ; -26.538,30.02 ccw(c-26.538,30.683) R30.2@-26.069,30.214 ; -26.538,30.02 cw(c-26.538,29.358) R30.2@-26.069,29.826 ; -26.538,30.02 ccw(c-26.538,30.683) R30.2@-26.069,30.214 ; -26.538,30.02 ccw(c-26.538,30.683) R30.2@-26.069,30.214 ; -26.538,30.02 cw(c-26.538,29.358) R30.2@-26.069,29.826 ; -26.538,30.02 ccw(c-26.538,30.683) R30.2@-26.069,30.214 ; -26.538,30.02 cw(c-26.538,29.358) R30.2@-26.069,29.826 ; -26.538,30.02 ccw(c-26.538,30.683) R30.2@-26.069,30.214 ; -26.538,30.02 cw(c-26.538,29.358) R30.2@-26.069,29.826
  Bottom Layer w0.8: v1(-33.808,24.491) -33.012,23.695 -29.423,23.695 ; v1@-33.783,24.593 v1@-33.783,26.066 ; -29.228,23.501 -28.111,22.383 -28.111,21.748 v1(-28.123,20.945) -28.135,20.165 v1@-28.136,20.122 ; -28.474,22.747 cw(c-29.473,21.748) -28.061,21.748 ; -28.474,22.747 cw(c-29.473,21.748) -28.061,21.748 ; -28.474,22.747 cw(c-29.473,21.748) -28.061,21.748 ; -33.012,23.695 ccw(c-33.012,25.399) -31.378,24.915 cw(c-33.012,25.399) -33.012,23.695 ; -31.941,23.695 ccw(c-31.941,25.082) -30.611,24.688 cw(c-31.941,25.082) -31.941,23.695 ; -30.87,23.695 ccw(c-30.87,24.765) -29.844,24.461 cw(c-30.87,24.765) -30.87,23.695
  other v1: -33.808,26.168
+5V: +5v_L.1 C24.2 C26.1 LeiDa.1 U5.3 | length 43.5
  Top Layer w0.508: LeiDa.1@-18.666,38.664 LeiDa.1@-18.666,38.562 -18.666,37.246 -18.247,36.828 ; -18.408,30.674 C26.1@-18.408,33.254 ; C24.2@-18.103,35.261 C24.2@-18.247,35.261 ; C26.1@-18.003,33.231 -18.407,33.635 -18.407,35.261 C24.2@-18.247,35.261 ; -18.408,30.969 ccw(c-17.717,30.969) -18.205,30.481 ; -18.408,30.969 ccw(c-17.717,30.969) -18.205,30.481 ; -18.408,30.969 ccw(c-17.717,30.969) -18.205,30.481 ; -18.408,31.527 cw(c-16.403,31.527) C26.1@-17.821,32.945 ; -18.408,31.527 cw(c-16.403,31.527) C26.1@-17.821,32.945 ; -18.408,31.527 cw(c-16.403,31.527) C26.1@-17.821,32.945 ; -18.408,31.527 cw(c-16.403,31.527) C26.1@-17.821,32.945 ; -18.408,31.527 cw(c-16.403,31.527) C26.1@-17.821,32.945 ; -18.407,34.342 cw(c-17.353,34.342) C24.2@-18.098,35.087 ; -18.407,34.342 cw(c-17.353,34.342) C24.2@-18.098,35.087 ; -18.407,34.342 cw(c-17.353,34.342) C24.2@-18.098,35.087 ; -18.407,34.342 cw(c-17.353,34.342) C24.2@-18.098,35.087 ; -18.407,34.342 cw(c-17.353,34.342) C24.2@-18.098,35.087 ; C24.2@-18.407,35.131 ccw(c-16.406,35.131) C26.1@-17.821,33.716 ; C24.2@-18.407,35.131 ccw(c-16.406,35.131) C26.1@-17.821,33.716 ; C24.2@-18.407,35.131 ccw(c-16.406,35.131) C26.1@-17.821,33.716 ; C24.2@-18.407,35.131 ccw(c-16.406,35.131) C26.1@-17.821,33.716 ; C24.2@-18.407,35.131 ccw(c-16.406,35.131) C26.1@-17.821,33.716 ; C24.2@-18.397,35.435 ccw(c-18.757,35.795) -18.247,35.795 ; C24.2@-18.397,35.435 ccw(c-18.757,35.795) -18.247,35.795 ; C24.2@-18.397,35.435 ccw(c-18.757,35.795) -18.247,35.795 ; C24.2@-18.397,35.435 ccw(c-18.757,35.795) -18.247,35.795 ; C24.2@-18.397,35.435 ccw(c-18.757,35.795) -18.247,35.795 ; C24.2@-18.247,35.261 -18.247,36.828 ; -18.247,35.795 ccw(c-17.738,35.795) C24.2@-18.098,35.435 ; -18.247,35.795 ccw(c-17.738,35.795) C24.2@-18.098,35.435 ; -18.247,35.795 ccw(c-17.738,35.795) C24.2@-18.098,35.435 ; -18.247,35.795 ccw(c-17.738,35.795) C24.2@-18.098,35.435 ; -18.247,35.795 ccw(c-17.738,35.795) C24.2@-18.098,35.435 ; -18.247,36.828 ccw(c-17.838,36.828) -18.114,36.525 cw(c-17.838,36.828) -18.247,36.828 ; -18.559,37.139 cw(c-19.243,36.455) -18.275,36.455 ccw(c-19.243,36.455) -18.559,37.139 ; -18.408,31.889 ccw(c-16.416,31.889) -17.824,30.481 cw(c-16.416,31.889) -18.408,31.889 ; -18.4,36.98 cw(c-18.758,36.622) -18.271,36.481 ccw(c-18.758,36.622) -18.4,36.98 ; -18.247,36.058 cw(c-17.783,36.058) -18.111,36.387 ccw(c-17.783,36.058) -18.247,36.058
  Bottom Layer w0.508: v1(-18.179,36.455) -18.179,35.743 -17.9,35.464 -17.9,34.727 +5v_L.1@-17.646,34.473
AD_BAT: C9.2 R16.1 U3.14 VBAT.1 | length 53.9
  Top Layer w0.203: U3.14@-34.904,19.114 -33.35,19.114 -32.581,18.344 -32.581,6.432 -32.225,6.076 v1(-31.794,6.076) ; v1@-31.768,6.076 -30.506,6.076 C9.2@-30.506,6.152 -30.506,6.678 ; -29.516,7.262 ccw(c-30.21,7.956) R16.1@-29.228,7.956 ; -29.411,7.366 cw(c-28.865,6.82) R16.1@-28.865,7.593 ; R16.1@-28.865,7.981 -28.865,7.913 -29.736,7.041 -30.143,7.041 ; -31.384,6.076 cw(c-31.384,5.199) -30.763,5.819 ccw(c-31.384,5.199) -31.384,6.076 ; -31.384,6.076 ccw(c-31.384,6.953) -30.763,6.333 cw(c-31.384,6.953) -31.384,6.076 ; C9.2@-30.663,6.429 ccw(c-30.782,6.678) -30.506,6.678 ; C9.2@-30.663,6.429 ccw(c-30.782,6.678) -30.506,6.678 ; C9.2@-30.663,6.429 ccw(c-30.782,6.678) -30.506,6.678 ; -30.506,6.678 ccw(c-30.23,6.678) C9.2@-30.349,6.429 ; -30.506,6.678 ccw(c-30.23,6.678) C9.2@-30.349,6.429 ; -30.506,6.678 ccw(c-30.23,6.678) C9.2@-30.349,6.429 ; -30.506,6.678 ccw(c-30.307,6.678) -30.378,6.492 cw(c-30.307,6.678) -30.506,6.678 ; -30.506,6.678 cw(c-30.705,6.678) -30.635,6.492 ccw(c-30.705,6.678) -30.506,6.678 ; -30.506,6.678 -30.143,7.041 ; -30.143,7.041 ccw(c-29.762,6.661) -30.206,6.357 cw(c-29.762,6.661) -30.143,7.041 ; v1@-31.446,6.076 ccw(c-31.446,7.042) -30.763,6.359 cw(c-31.446,7.042) v1@-31.446,6.076 ; -31.321,6.076 cw(c-31.321,5.287) -30.763,5.845 ccw(c-31.321,5.287) -31.321,6.076 ; C9.2@-30.542,6.128 cw(c-30.173,6.38) -30.489,6.695 ccw(c-30.173,6.38) C9.2@-30.542,6.128 ; C9.2@-30.374,6.242 cw(c-29.968,6.52) -30.316,6.868 ccw(c-29.968,6.52) C9.2@-30.374,6.242 ; -29.664,7.114 ccw(c-30.471,7.921) -29.33,7.948 cw(c-30.471,7.921) -29.664,7.114 ; -29.638,7.139 ccw(c-30.394,7.895) -29.329,7.979 cw(c-30.394,7.895) -29.638,7.139 ; -29.339,7.438 cw(c-28.966,7.065) -28.966,7.593 ccw(c-28.966,7.065) -29.339,7.438 ; -29.328,7.45 ccw(c-29.815,7.937) -29.126,7.952 cw(c-29.815,7.937) -29.328,7.45 ; -29.327,7.451 ccw(c-29.816,7.94) -29.126,7.994 cw(c-29.816,7.94) -29.327,7.451 ; -29.253,7.525 cw(c-28.966,7.239) -28.966,7.644 ccw(c-28.966,7.239) -29.253,7.525
  Bottom Layer w0.203: VBAT.1@-32.784,4.501 -32.784,5.111 v1@-31.87,6.025 ; v1@-31.87,6.025 ccw(c-31.245,5.4) -32.008,4.954 cw(c-31.245,5.4) v1@-31.87,6.025 ; VBAT.1@-32.784,5.4 ccw(c-32.784,6.097) -32.291,5.604 cw(c-32.784,6.097) VBAT.1@-32.784,5.4 ; VBAT.1@-32.535,4.647 cw(c-31.951,4.988) -32.429,5.466 ccw(c-31.951,4.988) VBAT.1@-32.535,4.647 ; VBAT.1@-32.359,4.749 cw(c-31.715,5.125) -32.243,5.653 ccw(c-31.715,5.125) VBAT.1@-32.359,4.749 ; -32.261,5.634 cw(c-31.794,5.167) -31.794,5.828 ccw(c-31.794,5.167) -32.261,5.634 ; -32.2,5.695 ccw(c-32.58,6.076) -32.042,6.076 cw(c-32.58,6.076) -32.2,5.695 ; VBAT.1@-32.184,4.852 cw(c-31.48,5.263) -32.056,5.839 ccw(c-31.48,5.263) VBAT.1@-32.184,4.852
AD_NTC: R15.1 U3.30 V_NTC.1 | length 62.3
  Top Layer w0.203: v1(-48.151,25.075) -48.151,24.681 ; U3.30@-39.203,22.213 -39.203,22.3 -39.947,23.043 -46.514,23.043 -48.151,24.681 ; v1@-48.309,25.075 ccw(c-47.737,25.075) -48.142,24.671 ; v1@-48.309,25.075 ccw(c-47.737,25.075) -48.142,24.671 ; v1@-48.309,25.075 ccw(c-47.737,25.075) -48.142,24.671 ; v1@-48.309,25.075 ccw(c-47.737,25.075) -48.142,24.671 ; v1@-48.309,25.075 ccw(c-47.737,25.075) -48.142,24.671 ; v1@-48.259,24.851 cw(c-48.341,24.681) -48.151,24.681 ; v1@-48.259,24.851 cw(c-48.341,24.681) -48.151,24.681 ; v1@-48.259,24.851 cw(c-48.341,24.681) -48.151,24.681 ; v1@-48.259,24.851 cw(c-48.341,24.681) -48.151,24.681 ; v1@-48.259,24.851 cw(c-48.341,24.681) -48.151,24.681 ; v1@-48.259,24.851 cw(c-48.341,24.681) -48.151,24.681 ; v1@-48.259,24.851 cw(c-48.341,24.681) -48.151,24.681 ; v1@-48.259,24.851 cw(c-48.341,24.681) -48.151,24.681 ; -48.151,24.681 cw(c-47.962,24.681) v1@-48.044,24.851 ; -48.151,24.681 cw(c-47.962,24.681) v1@-48.044,24.851 ; -48.151,24.681 cw(c-47.962,24.681) v1@-48.044,24.851 ; -48.151,24.681 cw(c-47.962,24.681) v1@-48.044,24.851 ; -48.151,24.681 cw(c-47.962,24.681) v1@-48.044,24.851 ; -48.151,24.681 cw(c-47.962,24.681) v1@-48.044,24.851 ; -48.151,24.681 cw(c-47.962,24.681) v1@-48.044,24.851 ; -48.151,24.681 cw(c-47.962,24.681) v1@-48.044,24.851 ; v1@-48.106,25.075 ccw(c-47.044,25.075) -47.795,24.324 ; v1@-48.106,25.075 ccw(c-47.044,25.075) -47.795,24.324 ; v1@-48.106,25.075 ccw(c-47.044,25.075) -47.795,24.324 ; v1@-48.106,25.075 ccw(c-47.044,25.075) -47.795,24.324 ; v1@-48.106,25.075 ccw(c-47.044,25.075) -47.795,24.324 ; v1@-47.903,25.075 ccw(c-46.35,25.075) -47.448,23.977 ; v1@-47.903,25.075 ccw(c-46.35,25.075) -47.448,23.977 ; v1@-47.903,25.075 ccw(c-46.35,25.075) -47.448,23.977 ; v1@-47.903,25.075 ccw(c-46.35,25.075) -47.448,23.977 ; v1@-47.903,25.075 ccw(c-46.35,25.075) -47.448,23.977 ; -39.565,22.661 ccw(c-39.203,23.023) U3.30@-39.203,22.511 ; -39.565,22.661 ccw(c-39.203,23.023) U3.30@-39.203,22.511 ; -39.565,22.661 ccw(c-39.203,23.023) U3.30@-39.203,22.511 ; U3.30@-39.218,22.314 ccw(c-39.203,22.329) U3.30@-39.203,22.308 ; U3.30@-39.218,22.314 ccw(c-39.203,22.329) U3.30@-39.203,22.308 ; U3.30@-39.218,22.314 ccw(c-39.203,22.329) U3.30@-39.203,22.308
  Bottom Layer w0.203: R15.1@-50.251,37.953 -49.701,37.953 -49.243,37.496 -49.243,35.368 -47.288,33.412 -47.288,32.213 -45.322,30.248 -45.322,30.028 ; v1(-48.151,25.075) -47.542,25.075 -45.322,27.295 -45.322,30.028 ; -45.034,30.028 ccw(c-45.034,30.419) V_NTC.1@-44.666,30.288 ; -45.017,30.028 cw(c-45.017,29.633) V_NTC.1@-44.652,29.786 ; V_NTC.1@-44.857,30.356 cw(c-45.322,30.523) -45.322,30.028 ; V_NTC.1@-44.84,29.707 ccw(c-45.322,29.505) -45.322,30.028 ; V_NTC.1@-44.011,30.054 -44.036,30.028 -45.322,30.028 ; R15.1@-50.302,38.169 cw(c-50.179,37.58) -49.753,38.006 ; R15.1@-50.302,38.169 cw(c-50.179,37.58) -49.753,38.006 ; R15.1@-50.302,38.169 cw(c-50.179,37.58) -49.753,38.006 ; R15.1@-50.302,38.169 cw(c-50.179,37.58) -49.753,38.006 ; R15.1@-50.302,38.169 cw(c-50.179,37.58) -49.753,38.006 ; R15.1@-50.26,37.97 cw(c-50.087,37.14) -49.487,37.74 ; R15.1@-50.26,37.97 cw(c-50.087,37.14) -49.487,37.74 ; R15.1@-50.26,37.97 cw(c-50.087,37.14) -49.487,37.74 ; R15.1@-50.26,37.97 cw(c-50.087,37.14) -49.487,37.74 ; R15.1@-50.26,37.97 cw(c-50.087,37.14) -49.487,37.74 ; R15.1@-50.219,37.771 cw(c-49.995,36.7) -49.221,37.474 ; R15.1@-50.219,37.771 cw(c-49.995,36.7) -49.221,37.474 ; R15.1@-50.219,37.771 cw(c-49.995,36.7) -49.221,37.474 ; R15.1@-50.219,37.771 cw(c-49.995,36.7) -49.221,37.474 ; R15.1@-50.219,37.771 cw(c-49.995,36.7) -49.221,37.474 ; -47.552,25.075 ccw(c-47.552,24.476) -47.976,24.9 cw(c-47.552,24.476) -47.552,25.075 ; -47.552,25.075 cw(c-47.552,25.675) -47.976,25.251 ccw(c-47.552,25.675) -47.552,25.075
BAT+: B+.1 BAT.3 C5.1 Q1.2 Q6.3 R6.1 U1.5 | length 118
  Top Layer w1: R6.1@-25.207,7.88 -25.207,9.229 Q1.2@-24.913,9.523 ; Q1.2@-25.207,9.061 cw(c-24.687,9.061) Q1.2@-25.055,9.429 ; BAT.3@-13.047,33.707 -12.845,33.505 BAT.3@-12.845,32.848 ; U1.5@-12.058,29.495 -11.821,29.732 C5.1@-10.229,29.732 C5.1@-10.229,29.808 ; -11.034,29.808 C5.1@-10.229,29.808 ; -10.229,30.232 C5.1@-10.229,29.808 ; C5.1@-10.085,29.808 C5.1@-10.229,29.808 ; -7.918,29.927 Q6.3@-7.724,30.12 ; v1@-25.439,8.637 ccw(c-26,9.197) Q1.2@-25.207,9.197 ; v1@-25.439,8.637 ccw(c-26,9.197) Q1.2@-25.207,9.197 ; v1@-25.439,8.637 ccw(c-26,9.197) Q1.2@-25.207,9.197 ; v1@-25.439,8.637 ccw(c-26,9.197) Q1.2@-25.207,9.197 ; v1@-25.439,8.637 ccw(c-26,9.197) Q1.2@-25.207,9.197 ; v1@-25.439,8.849 cw(c-26,8.289) R6.1@-25.207,8.289 ; v1@-25.439,8.849 cw(c-26,8.289) R6.1@-25.207,8.289 ; v1@-25.439,8.849 cw(c-26,8.289) R6.1@-25.207,8.289 ; v1@-25.439,8.849 cw(c-26,8.289) R6.1@-25.207,8.289 ; v1@-25.439,8.849 cw(c-26,8.289) R6.1@-25.207,8.289 ; BAT.3@-13.193,33.504 cw(c-13.682,32.824) BAT.3@-12.845,32.824 ; BAT.3@-13.193,33.504 cw(c-13.682,32.824) BAT.3@-12.845,32.824 ; BAT.3@-13.193,33.504 cw(c-13.682,32.824) BAT.3@-12.845,32.824 ; -10.565,30.568 cw(c-11.402,29.732) C5.1@-10.219,29.732 ; -10.565,30.568 cw(c-11.402,29.732) C5.1@-10.219,29.732 ; -10.565,30.568 cw(c-11.402,29.732) C5.1@-10.219,29.732 ; BAT.3@-12.797,33.707 ccw(c-10.608,33.707) -12.156,32.159 cw(c-10.608,33.707) BAT.3@-12.797,33.707
  Top Layer w1.2: BAT.3@-12.845,32.848 -10.229,30.232 ; C5.1@-10.403,29.927 -7.918,29.927 ; BAT.3@-12.847,33.407 ccw(c-11.503,33.407) -12.453,32.456 cw(c-11.503,33.407) BAT.3@-12.847,33.407 ; -10.395,30.397 cw(c-11.06,29.732) -10.119,29.732 ccw(c-11.06,29.732) -10.395,30.397
  Bottom Layer w0.254: v1(-25.545,8.743) -25.545,9.353 -21.43,13.468 -21.43,15.849 -21.449,15.868 -21.449,16.624 -21.43,16.643 ; -21.024,16.973 -21.1,16.973 -21.43,16.643 ; BAT.3@-13.047,33.084 cw(c-13.047,32.265) -12.468,32.844 ; BAT.3@-13.047,33.707 -12.972,33.632 BAT.3@-12.972,33.348 ; BAT.3@-12.932,33.707 ccw(c-11.97,33.707) BAT.3@-12.65,33.026 ; v1@-25.703,8.901 ccw(c-26.084,9.282) -25.545,9.282 ; v1@-25.703,8.901 ccw(c-26.084,9.282) -25.545,9.282 ; v1@-25.703,8.901 ccw(c-26.084,9.282) -25.545,9.282 ; -25.545,9.282 ccw(c-25.007,9.282) v1@-25.388,8.901 ; -25.545,9.282 ccw(c-25.007,9.282) v1@-25.388,8.901 ; -25.545,9.282 ccw(c-25.007,9.282) v1@-25.388,8.901 ; -21.43,16.643 -21.43,16.719 -20.719,17.43 -16.164,17.43 -11.289,22.305 -11.289,25.469 -10.618,26.14 -10.618,30.544 ; -10.618,30.544 ccw(c-9.035,30.544) -9.273,28.98 cw(c-9.035,30.544) -10.618,30.544 ; -10.618,28.476 ccw(c-9.35,28.476) -9.54,27.222 cw(c-9.35,28.476) -10.618,28.476 ; -10.618,28.771 ccw(c-9.305,28.771) -9.502,27.473 cw(c-9.305,28.771) -10.618,28.771 ; -10.618,29.067 ccw(c-9.26,29.067) -9.464,27.724 cw(c-9.26,29.067) -10.618,29.067 ; -10.618,29.362 ccw(c-9.215,29.362) -9.426,27.975 cw(c-9.215,29.362) -10.618,29.362 ; -10.618,29.658 ccw(c-9.17,29.658) -9.387,28.226 cw(c-9.17,29.658) -10.618,29.658 ; -10.618,29.953 ccw(c-9.125,29.953) -9.349,28.477 cw(c-9.125,29.953) -10.618,29.953 ; -10.618,30.249 ccw(c-9.08,30.249) -9.311,28.729 cw(c-9.08,30.249) -10.618,30.249
  Bottom Layer w0.381: v1@-25.658,8.856 ccw(c-25.93,9.128) -25.545,9.128 ccw(c-25.16,9.128) v1@-25.432,8.856
  Bottom Layer w0.635: BAT.3@-13.047,33.707 -13.047,32.974 -10.618,30.544 -10.356,30.282 ; B+.1@-10.356,27.768 -10.356,30.282 ; -10.356,30.282 ccw(c-8.789,30.282) -9.198,28.77 cw(c-8.789,30.282) -10.356,30.282 ; BAT.3@-12.565,33.407 ccw(c-10.354,33.407) -11.917,31.844 cw(c-10.354,33.407) BAT.3@-12.565,33.407 ; -10.356,29.453 ccw(c-9.013,29.453) -9.364,28.157 cw(c-9.013,29.453) -10.356,29.453